# Altium PCB PCB.PcbDoc
Units mil, origin at the board's own origin, x right, y up, seen from the top; angles counter-clockwise.
Board outline 2300 x 2555 mil, 2 copper layers (Top Layer, Bottom Layer); 31 components, 17 nets, 62 pads, 0 vias.
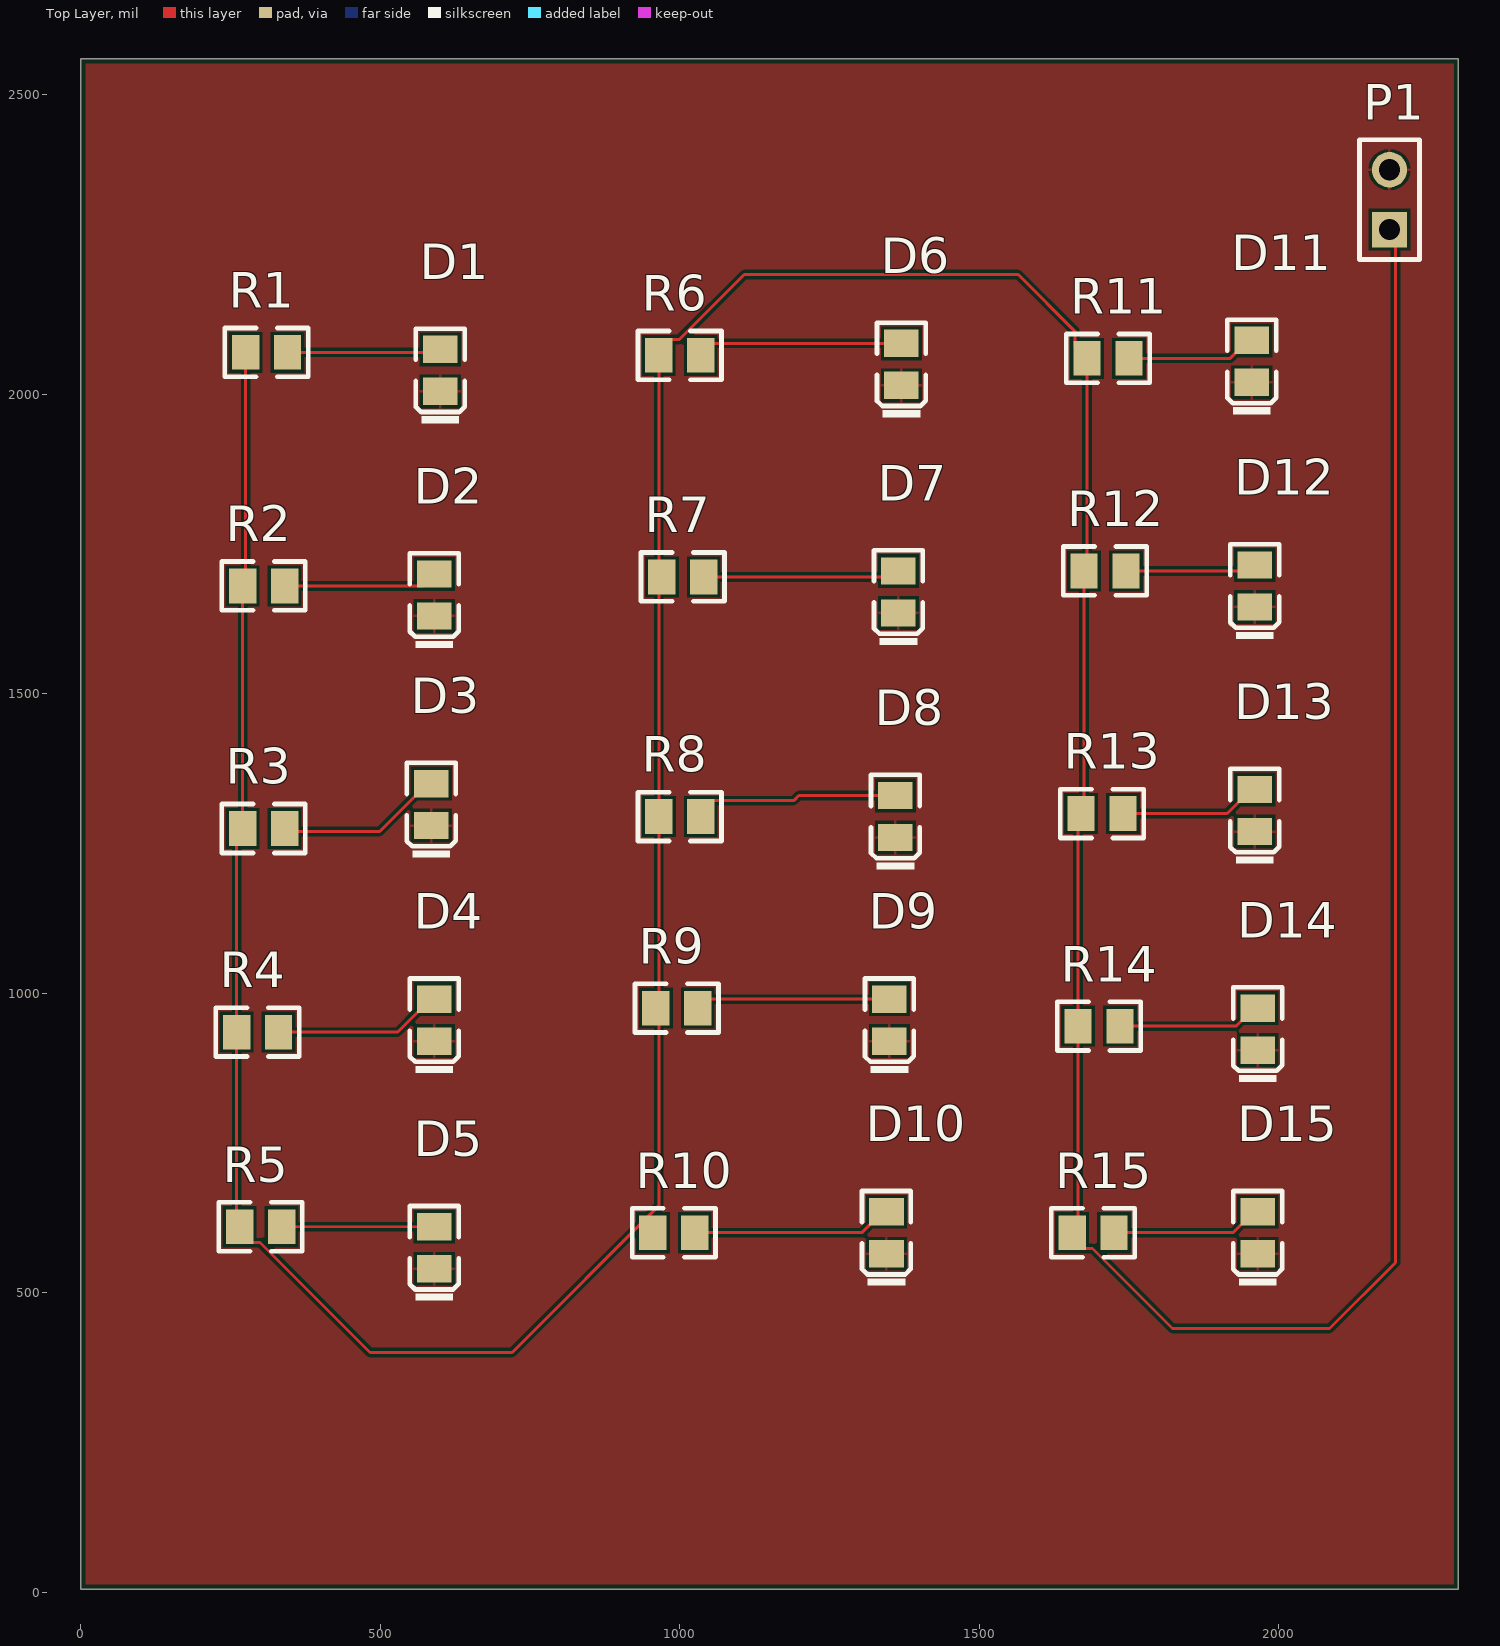
[diagram p0: Top Layer view]
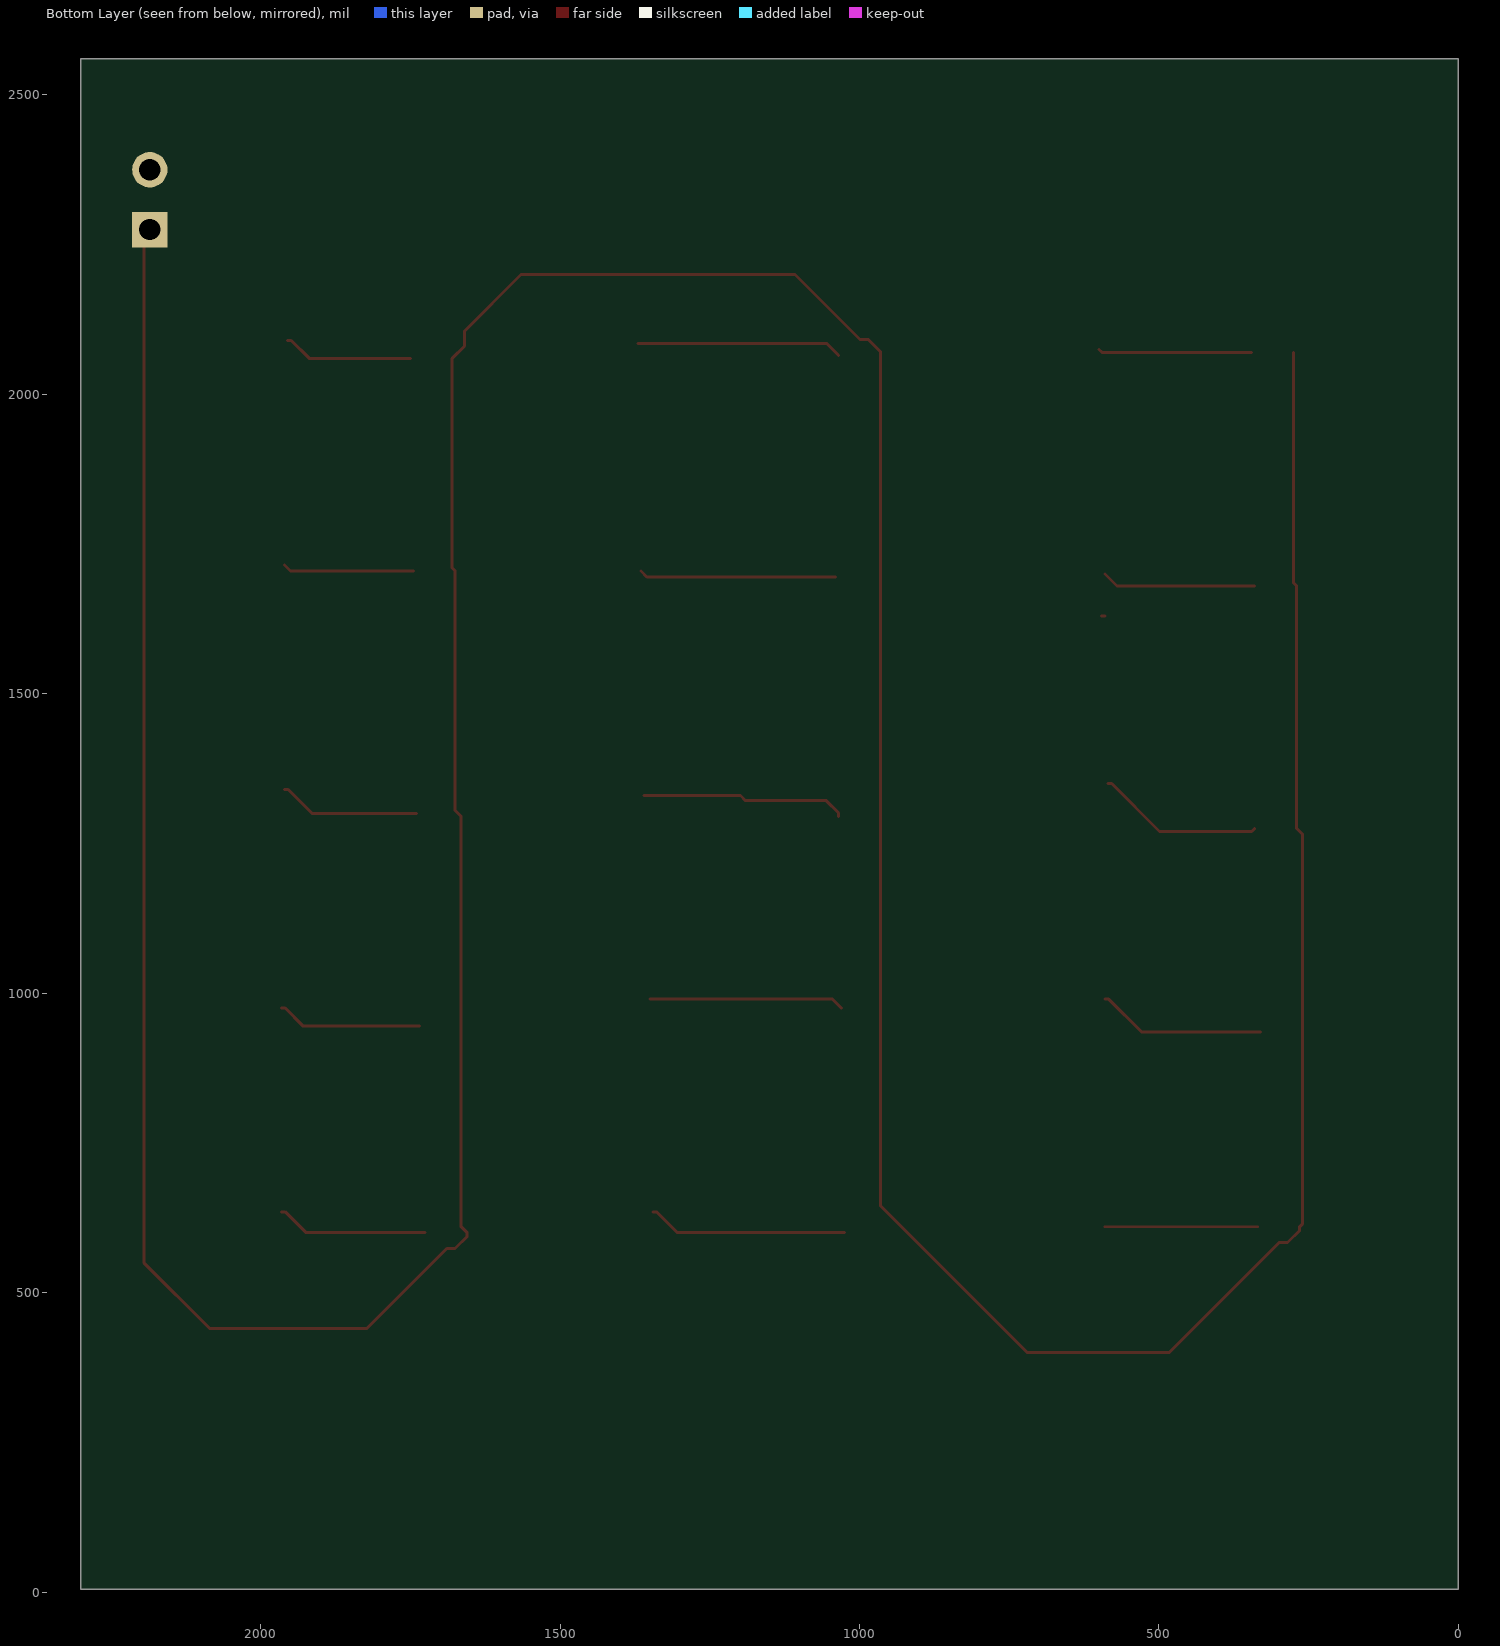
[diagram p1: Bottom Layer view, seen from below]
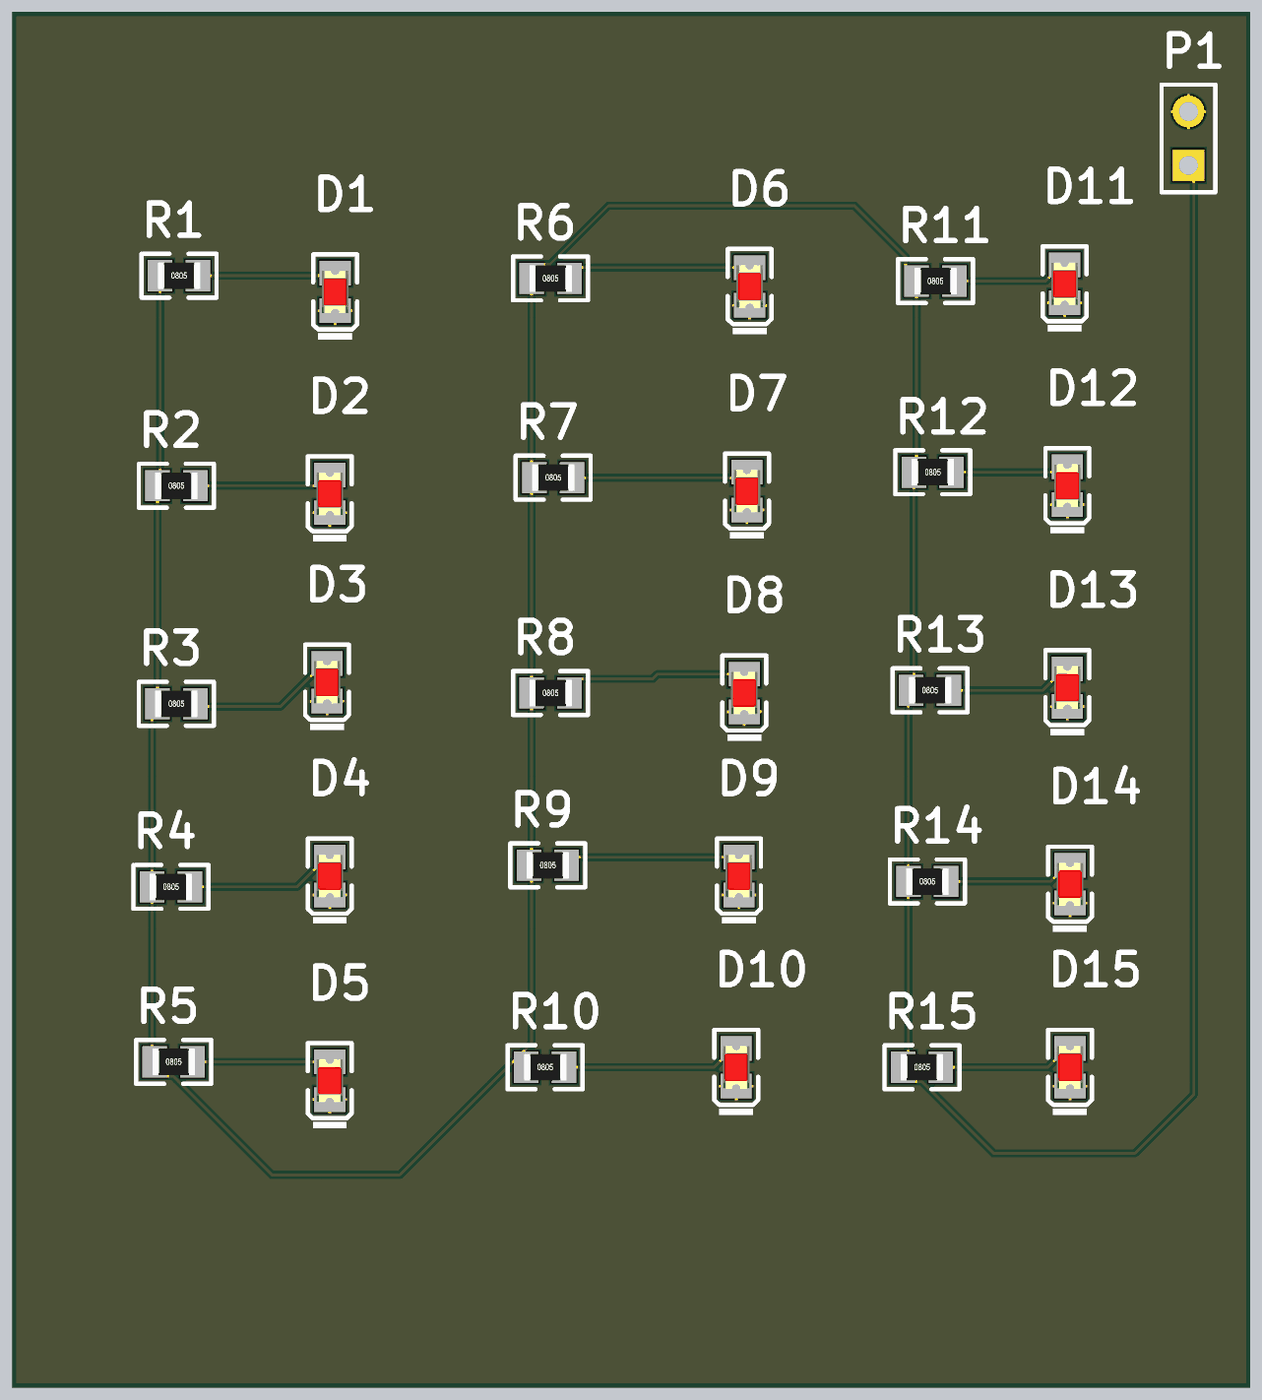
[diagram p2: 3D render of the assembled board from above, using the file's embedded part models]

## Layer stack, top to bottom
Top Solder: solder mask 0.4, Solder Resist, Dk 3.5
Top Layer: signal copper 1.4
Dielectric 1: dielectric 12.6, FR-4, Dk 4.8
Bottom Layer: signal copper 1.4
Bottom Solder: solder mask 0.4, Solder Resist, Dk 3.5

## Board outline
0,5 2300,5 2300,2560 0,2560

## Design rules (kind name [scope] priority, off if disabled: settings)
BoardOutlineClearance [All] p1: gap=7.87 ignorepadtopadclearanceinfootprint=FALSE
Clearance [All] p1: gap=5 ignorepadtopadclearanceinfootprint=FALSE except(9.84: Arc-Hole Track-Hole SMDPad-Hole THPad-Hole Via-Hole Fill-Hole Poly-Hole Region-Hole Text-Hole)
ComponentClearance [All] p1: gap=5 collisioncheckmode=3 verticalgap=5 showdistances=TRUE
DiffPairsRouting [All] p1: maxlimit=10 minlimit=5 mostfreqgap=5 toplayer_minwidth=5 toplayer_maxwidth=1000 toplayer_prefwidth=5 bottomlayer_minwidth=5 bottomlayer_maxwidth=1000 bottomlayer_prefwidth=5 maxuncoupledlength=500
Height [All] p1: minheight=0 maxheight=71497.94 prefheight=500
HoleSize [All] p1: absolutevalues=TRUE maxlimit=248.03 minlimit=11.81 maxpercent=80.000 minpercent=20.000
HoleToHoleClearance [All] p1: gap=9.84 allowstackedmicrovias=FALSE
MinimumAnnularRing [All] p1: minimumring=3
MinimumSolderMaskSliver [All] p1: minsoldermaskwidth=0
PlaneClearance [All] p1: clearance=5
PlaneConnect PlaneConnectPowerPads [InPadClass('PowerPads')] p1: planeconnectstyle=Direct reliefexpansion=20 reliefentries=4 reliefconductorwidth=10 reliefairgap=10
PlaneConnect [All] p2: pad.planeconnectstyle=Relief pad.reliefexpansion=11.81 pad.reliefentries=4 pad.reliefconductorwidth=5 pad.reliefairgap=5 via.planeconnectstyle=Direct via.reliefexpansion=11.81 via.reliefentries=4 via.reliefconductorwidth=5 via.reliefairgap=5
PolygonConnect PolygonConnectPowerPads [All vs (InPadClass('PowerPads'))] p1: connectstyle=Direct reliefconductorwidth=10 reliefentries=4 polygonreliefangle="90 Angle" airgapwidth=10
PolygonConnect [All] p2: thpad.connectstyle=Relief thpad.reliefconductorwidth=5 thpad.reliefentries=4 thpad.polygonreliefangle="90 Angle" thpad.airgapwidth=5 smdpad.connectstyle=Relief smdpad.reliefconductorwidth=5 smdpad.reliefentries=4 smdpad.polygonreliefangle="90 Angle" smdpad.airgapwidth=5 via.connectstyle=Direct via.reliefconductorwidth=5 via.reliefentries=4 via.polygonreliefangle="90 Angle" via.airgapwidth=5
RoutingVias [All] p1: holewidth=11.81 width=23.62 viastyle="Through Hole" minholewidth=11.81 minwidth=23.62 maxholewidth=23.62 maxwidth=259.84
SilkToSilkClearance [All] p1: silktosilkclearance=0
SilkToSolderMaskClearance [IsPad] p1: minsilkscreentomaskgap=5 clearancetoexposedcopper=TRUE
SolderMaskExpansion [All] p1: expansion=2.95 istentingtop=FALSE
Width [All] p1: maxlimit=1000 minlimit=5 preferedwidth=5 minimp=50.000000 maximp=50.000000 favimp=50.000000
20 further rules are at their usual default settings.

## Components (designator, comment, footprint, x,y, rotation, side; value= is the part's Value field where it differs from the comment)
D1 "0805 Red" 0805_LED_S1 600,2039.96 r90 top
D2 "0805 Red" 0805_LED_S1 590,1664.96 r90 top
D3 "0805 Red" 0805_LED_S1 585,1314.96 r90 top
D4 "0805 Red" 0805_LED_S1 590,955 r90 top
D5 "0805 Red" 0805_LED_S1 590,574.96 r90 top
D6 "0805 Red" 0805_LED_S1 1370,2050 r90 top
D7 "0805 Red" 0805_LED_S1 1365,1669.96 r90 top
D8 "0805 Red" 0805_LED_S1 1360,1295 r90 top
D9 "0805 Red" 0805_LED_S1 1350,955 r90 top
D10 "0805 Red" 0805_LED_S1 1345,599.96 r90 top
D11 "0805 Red" 0805_LED_S1 1955,2054.96 r90 top
D12 "0805 Red" 0805_LED_S1 1960,1679.96 r90 top
D13 "0805 Red" 0805_LED_S1 1960,1304.96 r90 top
D14 "0805 Red" 0805_LED_S1 1965,940.04 r90 top
D15 "0805 Red" 0805_LED_S1 1965,599.96 r90 top
P1 "Header 2" HDR1X2 2185,2275 r90 top
R1 "1KΩ ±1%" 0805_R 310,2070 r0 top
R2 "1KΩ ±1%" 0805_R 305.04,1680 r0 top
R3 "1KΩ ±1%" 0805_R 305.04,1275 r0 top
R4 "1KΩ ±1%" 0805_R 294.96,935 r0 top
R5 "1KΩ ±1%" 0805_R 300,610 r0 top
R6 "1KΩ ±1%" 0805_R 1000,2065 r0 top
R7 "1KΩ ±1%" 0805_R 1005.04,1695 r0 top
R8 "1KΩ ±1%" 0805_R 1000.04,1295 r0 top
R9 "1KΩ ±1%" 0805_R 995,975 r0 top
R10 "1KΩ ±1%" 0805_R 990.04,600 r0 top
R11 "1KΩ ±1%" 0805_R 1715.04,2060 r0 top
R12 "1KΩ ±1%" 0805_R 1710.04,1705 r0 top
R13 "1KΩ ±1%" 0805_R 1705,1300 r0 top
R14 "1KΩ ±1%" 0805_R 1700,945 r0 top
R15 "1KΩ ±1%" 0805_R 1690.04,600 r0 top

## Footprints (in the part's own frame and the unit in brackets; to place one, negate y for a bottom-side part, rotate by r counter-clockwise, add the part's x,y. Pads: shape width x height; smd on the part's side, far side on the other; paste and mask are expansions set on the pad)
0805_LED_S1 [mm]
  rect 1.16x1.47 smd: A(0.89,0) K(-0.89,0)
  silkscreen extent -2.24,-1.04 1.77,1.03, body extent -1.01,-0.62 1.01,0.62, height 1.1
0805_R [mm]
  rect 1.16x1.47 smd: 1(-0.89,0) 2(0.89,0)
  silkscreen extent -1.77,-1.04 1.77,1.03, body extent -1,-0.62 1,0.63, height 0.49
HDR1X2 [mm] "Connector; Header; 2 Position"
  rect 1.5x1.5 hole 0.9: 1(0,0)
  round 1.5 hole 0.9: 2(2.54,0)
  silkscreen extent -1.27,-1.27 3.81,1.27

## Part data
D1 D2 D3 D4 D5 D6 D7 D8 D9 D10 D11 D12 D13 D14 D15: library part "0805 LED Red", "LED", Color=Red, Manufacturer="Foshan NationStar Optoelectronics", Package=0805, PartNumber=FC-2012HRK-620D, SuppliersPartNumber=C84256, ComponentLink1Description=供应商链接, ComponentLink1URL=http://www.szlcsc.com/product/details_2668.html, Supplier=LC
P1: "Header, 2-Pin", LatestRevisionDate=17-Jul-2002, LatestRevisionNote="Re-released for DXP Platform.", Publisher="Altium Limited"
R1 R2 R3 R4 R5 R6 R7 R8 R9 R10 R11 R12 R13 R14 R15: library part "0805 1K (1001) 1%", "Chip resistor", Manufacturer="Uniroyal Elec", Package=0805, PartNumber=0805W8F1001T5E, Power=1/8W, Resistance=1KΩ, SuppliersPartNumber=C17513, Tolerance=1%, ComponentLink1Description="Supplier link", ComponentLink1URL=http://www.szlcsc.com/product/details_18201.html, Supplier=LC

## Nets (pads, with @x,y where several pads share a name; then routed paths per layer and width w, separated by ;. In a path a pad name is that pad's centre, name@x,y a point inside that pad or via, vN(x,y) a via of type N, cw(c..) or ccw(c..) an arc to the next point about the centre after c; other vN are vias at no path point)
GND: D1.K D2.K D3.K D4.K D5.K D6.K D7.K D8.K D9.K D10.K D11.K D12.K D13.K D14.K D15.K P1.2 | length 6.1
  Top Layer w5: D2.K D2.K@596.1,1629.92
NetD1_A: D1.A R1.2 | length 257
  Top Layer w5: R1.2 595,2070 D1.A
NetD2_A: D2.A R2.2 | length 258.2
  Top Layer w5: R2.2 570,1680 D2.A
NetD3_A: D3.A R3.2 | length 280.2
  Top Layer w5: R3.2 345,1270.08 345,1270 498.9,1270 578.9,1350 D3.A
NetD4_A: D4.A R4.2 | length 282.8
  Top Layer w5: R4.2 528.86,935 583.9,990.04 D4.A
NetD5_A: D5.A R5.2 | length 255
  Top Layer w5: R5.2 D5.A
NetD6_A: D6.A R6.2 | length 343.3
  Top Layer w5: R6.2 1055.08,2085.04 D6.A
NetD7_A: D7.A R7.2 | length 329.1
  Top Layer w5: R7.2 1355,1695 D7.A
NetD8_A: D8.A R8.2 | length 343
  Top Layer w5: R8.2 1035.08,1301.1 1055.41,1321.44 1190.19,1321.44 1198.79,1330.04 D8.A
NetD9_A: D9.A R9.2 | length 326.2
  Top Layer w5: R9.2 1045.08,990.04 D9.A
NetD10_A: D10.A R10.2 | length 334.4
  Top Layer w5: R10.2 1303.9,600 1338.9,635 D10.A
NetD11_A: D11.A R11.2 | length 217.3
  Top Layer w5: R11.2 1918.9,2060 1948.9,2090 D11.A
NetD12_A: D12.A R12.2 | length 219.1
  Top Layer w5: R12.2 1950,1705 D12.A
NetD13_A: D13.A R13.2 | length 236.5
  Top Layer w5: R13.2 1913.9,1300 1953.9,1340 D13.A
NetD14_A: D14.A R14.2 | length 242.4
  Top Layer w5: R14.2 1928.82,945 1958.9,975.08 D14.A
NetD15_A: D15.A R15.2 | length 254.4
  Top Layer w5: R15.2 1923.9,600 1958.9,635 D15.A
VCC: P1.1 R1.1 R2.1 R3.1 R4.1 R5.1 R6.1 R7.1 R8.1 R9.1 R10.1 R11.1 R12.1 R13.1 R14.1 R15.1 | length 8482.5
  Top Layer w5: R1.1 274.96,1684.96 R2.1 R3.1 259.92,1264.92 R4.1 259.92,615.04 R5.1 264.96,603.9 285.3,583.56 299.1,583.56 482.66,400 720,400 964.96,644.96 R6.1 964.96,2071.1 985.3,2091.44 999.1,2091.44 1107.66,2200 1565,2200 1659.67,2105.33 1659.67,2080.33 R11.1 1680,1710 R12.1 1675,1305.04 R13.1 1664.96,1295 R14.1 1664.96,609.96 R15.1 1655,593.9 1675.33,573.56 1689.14,573.56 1822.7,440 2085,440 2195,550 2195,2265 P1.1

## Polygon pours and split planes (outlines as drawn)
GND on Top Layer "GND_L01_P000" (solid, pour order 0): 0,2560 0,5 2300,5 2300,2560